# Allegro board MOTHER_BOARD-ROA.brd
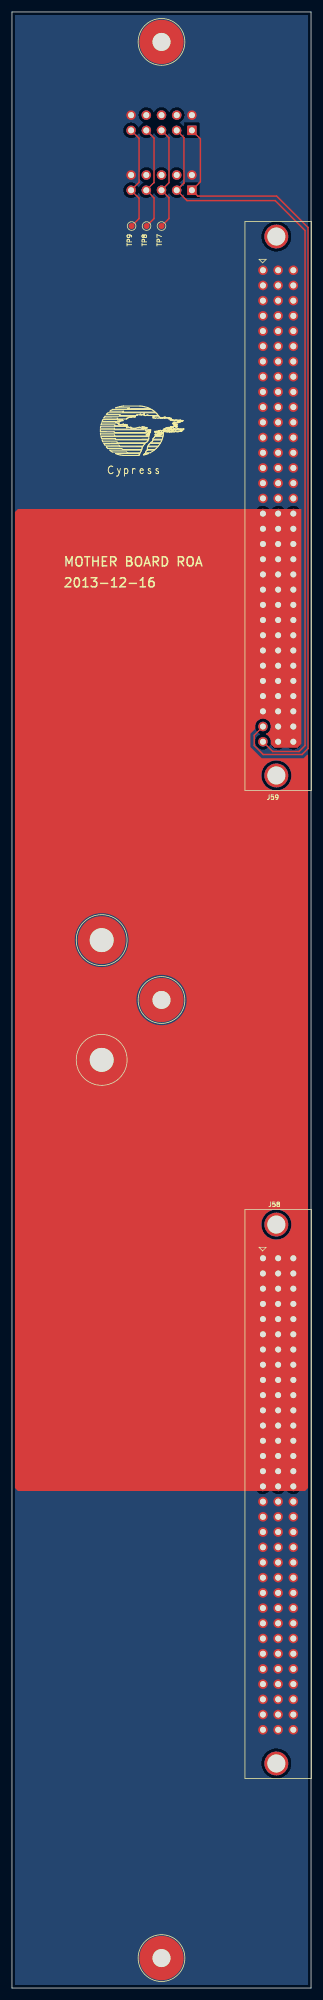
[diagram p0: board, top side]
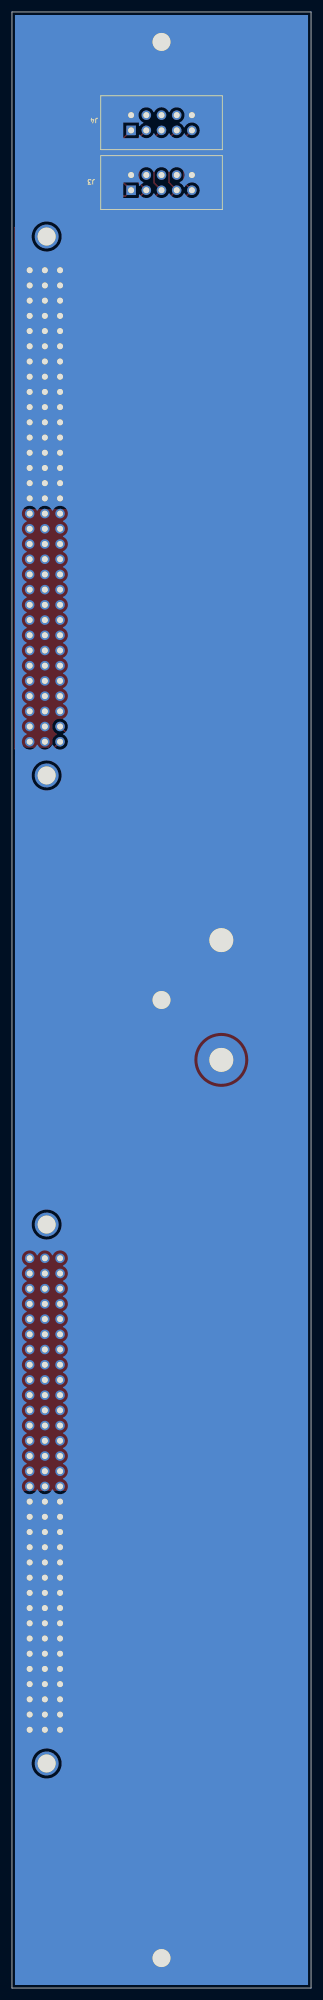
[diagram p1: board, bottom side, seen from below]

Outline 50 x 330 mm; copper layers: TOP, BOTTOM. Coordinates in mm from the lower left corner of the outline.
Outline path: 0,330 50,330 50,0 0,0 0,330

## Placement (name value [footprint] x y rotation side)
J3  HDR2X5  [2X5_2D54]  25 301.5 180 bottom
J4  HDR2X5  [2X5_2D54]  25 311.5 180 bottom
J58  DIN41612_9001-13961C00A  [9001-13961C00A]  44.5 82.5 270 top
J59  DIN41612_9001-13961C00A  [9001-13961C00A]  44.5 247.5 270 top
NOREF  -  []  19 262.5 0 top
POWER_PAD1  TESTPOINT  [4_8DIPPAD]  15 155 0 top
POWER_PAD2  TESTPOINT  [4_8DIPPAD]  15 175 0 top
SH1  SH  [MTH-11]  25 5 0 top
SH2  SH  [MTH-11]  25 165 0 top
SH3  SH  [MTH-11]  25 325 0 top
TP7  TESTPOINT  [TPOINT]  25 294.25 0 top
TP8  TESTPOINT  [TPOINT]  22.5 294.25 0 top
TP9  TESTPOINT  [TPOINT]  20 294.25 0 top

## Library data of the parts
J3 J4 = 2X5_2D54
J58 J59 = 9001-13961C00A
POWER_PAD1 POWER_PAD2 = 4_8DIPPAD
SH1-SH3 = MTH-11
TP7-TP9 = TPOINT

## Footprints (pads in the part's own frame, mm; a bottom-side part is the same pattern mirrored in y, then rotated)
2X5_2D54
  rect 1.6x1.6 hole 1: 1(-5.08,-1.27)
  round 1.6 hole 1: 2(-5.08,1.27) 3(-2.54,-1.27) 4(-2.54,1.27) 5(0,-1.27) 6(0,1.27) 7(2.54,-1.27) 8(2.54,1.27) 9(5.08,-1.27) 10(5.08,1.27)
4_8DIPPAD
  round 8 hole 4: 1(0,0)
9001-13961C00A
  round 1.6 hole 1: 1(-39.37,-2.54) 2(-36.83,-2.54) 3(-34.29,-2.54) 4(-31.75,-2.54) 5(-29.21,-2.54) 6(-26.67,-2.54) 7(-24.13,-2.54) 8(-21.59,-2.54) 9(-19.05,-2.54) 10(-16.51,-2.54) 11(-13.97,-2.54) 12(-11.43,-2.54) 13(-8.89,-2.54) 14(-6.35,-2.54) 15(-3.81,-2.54) 16(-1.27,-2.54) 17(1.27,-2.54) 18(3.81,-2.54) 19(6.35,-2.54) 20(8.89,-2.54) 21(11.43,-2.54) 22(13.97,-2.54) 23(16.51,-2.54) 24(19.05,-2.54) 25(21.59,-2.54) 26(24.13,-2.54) 27(26.67,-2.54) 28(29.21,-2.54) 29(31.75,-2.54) 30(34.29,-2.54) 31(36.83,-2.54) 32(39.37,-2.54) 33(-39.37,0) 34(-36.83,0) 35(-34.29,0) 36(-31.75,0) 37(-29.21,0) 38(-26.67,0) 39(-24.13,0) 40(-21.59,0) 41(-19.05,0) 42(-16.51,0) 43(-13.97,0) 44(-11.43,0) 45(-8.89,0) 46(-6.35,0) 47(-3.81,0) 48(-1.27,0) 49(1.27,0) 50(3.81,0) 51(6.35,0) 52(8.89,0) 53(11.43,0) 54(13.97,0) 55(16.51,0) 56(19.05,0) 57(21.59,0) 58(24.13,0) 59(26.67,0) 60(29.21,0) 61(31.75,0) 62(34.29,0) 63(36.83,0) 64(39.37,0) 65(-39.37,2.54) 66(-36.83,2.54) 67(-34.29,2.54) 68(-31.75,2.54) 69(-29.21,2.54) 70(-26.67,2.54) 71(-24.13,2.54) 72(-21.59,2.54) 73(-19.05,2.54) 74(-16.51,2.54) 75(-13.97,2.54) 76(-11.43,2.54) 77(-8.89,2.54) 78(-6.35,2.54) 79(-3.81,2.54) 80(-1.27,2.54) 81(1.27,2.54) 82(3.81,2.54) 83(6.35,2.54) 84(8.89,2.54) 85(11.43,2.54) 86(13.97,2.54) 87(16.51,2.54) 88(19.05,2.54) 89(21.59,2.54) 90(24.13,2.54) 91(26.67,2.54) 92(29.21,2.54) 93(31.75,2.54) 94(34.29,2.54) 95(36.83,2.54) 96(39.37,2.54)
  round 4 hole 3: 97(-45,-0.3) 98(45,-0.3)
MTH-11
  round 7.4 hole 3: 1(0,0)
TPOINT
  round 1 smd: 1(0,0)

## Nets
GND: J3.2 J3.10 J4.2 J4.10 J58.17 J58.18 J58.19 J58.20 J58.21 J58.22 J58.23 J58.24 J58.25 J58.26 J58.27 J58.28 J58.29 J58.30 J58.31 J58.32 J58.49 J58.50 J58.51 J58.52 J58.53 J58.54 J58.55 J58.56 J58.57 J58.58 J58.59 J58.60 J58.61 J58.62 J58.63 J58.64 J58.81 J58.82 J58.83 J58.84 J58.85 J58.86 J58.87 J58.88 J58.89 J58.90 J58.91 J58.92 J58.93 J58.94 J58.95 J58.96 J59.1 J59.2 J59.3 J59.4 J59.5 J59.6 J59.7 J59.8 J59.9 J59.10 J59.11 J59.12 J59.13 J59.14 J59.15 J59.16 J59.33 J59.34 J59.35 J59.36 J59.37 J59.38 J59.39 J59.40 J59.41 J59.42 J59.43 J59.44 J59.45 J59.46 J59.47 J59.48 J59.65 J59.66 J59.67 J59.68 J59.69 J59.70 J59.71 J59.72 J59.73 J59.74 J59.75 J59.76 J59.77 J59.78 J59.79 J59.80 POWER_PAD2.1 SH1.1 SH2.1 SH3.1
AARDVARK SCL: J3.1 J4.1 J59.31
AARDVARK SDA: J3.3 J4.3 J59.32
ATX_IN: J58.1 J58.2 J58.3 J58.4 J58.5 J58.6 J58.7 J58.8 J58.9 J58.10 J58.11 J58.12 J58.13 J58.14 J58.15 J58.16 J58.33 J58.34 J58.35 J58.36 J58.37 J58.38 J58.39 J58.40 J58.41 J58.42 J58.43 J58.44 J58.45 J58.46 J58.47 J58.48 J58.65 J58.66 J58.67 J58.68 J58.69 J58.70 J58.71 J58.72 J58.73 J58.74 J58.75 J58.76 J58.77 J58.78 J58.79 J58.80 J59.17 J59.18 J59.19 J59.20 J59.21 J59.22 J59.23 J59.24 J59.25 J59.26 J59.27 J59.28 J59.29 J59.30 J59.49 J59.50 J59.51 J59.52 J59.53 J59.54 J59.55 J59.56 J59.57 J59.58 J59.59 J59.60 J59.61 J59.62 J59.63 J59.64 J59.81 J59.82 J59.83 J59.84 J59.85 J59.86 J59.87 J59.88 J59.89 J59.90 J59.91 J59.92 J59.93 J59.94 J59.95 J59.96 POWER_PAD1.1
PIOA: J3.7 J4.7 TP8.1
PIOB: J3.9 J4.9 TP9.1
PIOC: J3.5 J4.5 TP7.1

Pads without a net: J3 4 6 8; J4 4 6 8; J58 97 98; J59 97 98

## Routing (per net, layer and track width the routed paths; a pad name or vN(x,y) marks a point on that pad's centre or on a via; arc(x,y) is an arc through that point)
AARDVARK SCL: length 134
  TOP w0.25: J4.1 31.5,308.81 31.5,301.65 J3.1 31.06,299.25 44.25,299.25 49.5,294 49.5,207 48.5,206 42,206 40.5,207.5 40.5,209.21 J59.31
AARDVARK SDA: length 129.4
  TOP w0.25: J59.32 43.59,206.5 48,206.5 49,207.5 49,293.5 44,298.5 29.27,298.5 J3.3 28.75,301.44 28.75,309.02 J4.3
PIOA: length 18.1
  TOP w0.25: TP8.1 23.75,295.5 23.75,298.94 J3.7 23.75,301.52 23.75,308.94 J4.7
PIOB: length 18.2
  TOP w0.25: TP9.1 21.25,295.5 21.25,298.9 J3.9 21.25,301.56 21.25,308.9 J4.9
PIOC: length 18.1
  TOP w0.25: J4.5 26.25,308.98 26.25,301.48 J3.5 26.25,298.98 26.25,295.5 TP7.1

## Copper pours and planes (outline as drawn; the poured copper is in the pictures)
GND on BOTTOM (solid shape): outline of 4074 points within 0.5,0.5 49.5,329.5
ATX_IN on TOP (solid shape): 48.32,247 48.35,246.99 48.37,246.98 48.37,246.95 48.37,207.76 47.74,207.13 43.85,207.13 43.23,207.75 43.22,207.77 43.23,207.84 43.25,207.94 43.26,208.04 43.26,208.14 43.26,208.24 43.24,208.34 43.22,208.44 43.19,208.54 43.16,208.63 43.12,208.72 43.07,208.81 43.01,208.9 42.95,208.98 42.88,209.05 42.81,209.12 42.73,209.18 42.64,209.24 42.56,209.29 42.5,209.31 42.48,209.33 42.46,209.36 42.45,209.39 42.45,209.41 42.46,209.44 42.48,209.47 42.5,209.49 42.56,209.51 42.64,209.56 42.73,209.62 42.81,209.68 42.88,209.75 42.95,209.83 43.01,209.91 43.07,209.99 43.12,210.08 43.16,210.17 43.2,210.27 43.23,210.37 43.24,210.47 43.26,210.57 43.26,210.67 43.26,210.77 43.24,210.87 43.23,210.97 43.2,211.07 43.16,211.17 43.12,211.26 43.07,211.35 43.01,211.43 42.95,211.51 42.88,211.59 42.81,211.66 42.73,211.72 42.64,211.78 42.56,211.83 42.46,211.87 42.37,211.91 42.27,211.93 42.17,211.95 42.07,211.97 41.97,211.97 41.87,211.97 41.77,211.96 41.67,211.94 41.57,211.91 41.47,211.88 41.38,211.83 41.29,211.78 41.2,211.73 41.12,211.67 41.05,211.6 40.98,211.52 40.92,211.44 40.86,211.36 40.81,211.27 40.76,211.18 40.73,211.09 40.7,210.99 40.68,210.89 40.66,210.79 40.66,210.69 40.66,210.58 40.67,210.48 40.69,210.38 40.71,210.32 40.7,210.29 39.87,209.47 39.87,207.24 41.74,205.37 48.76,205.37 49.33,205.94 49.34,205.95 49.36,205.97 49.39,205.97 49.42,205.97 49.45,205.96 49.47,205.94 49.49,205.91 49.5,205.89 49.5,205.87 49.5,83.5 49,83 1,83 0.5,83.5 0.5,127.5 41.7,127.5 41.7,127.36 41.72,127.22 41.74,127.08 41.76,126.94 41.8,126.8 41.84,126.67 41.89,126.53 41.95,126.41 42.02,126.28 42.09,126.16 42.17,126.04 42.25,125.93 42.35,125.82 42.44,125.72 42.55,125.62 42.66,125.53 42.77,125.45 42.89,125.37 43.01,125.3 43.14,125.24 43.27,125.18 43.4,125.13 43.54,125.09 43.67,125.06 43.81,125.03 43.95,125.01 44.09,125 44.24,125 44.38,125.01 44.52,125.02 44.66,125.04 44.8,125.07 44.93,125.11 45.07,125.15 45.2,125.21 45.33,125.27 45.45,125.33 45.57,125.41 45.69,125.49 45.8,125.58 45.9,125.67 46.01,125.77 46.1,125.87 46.19,125.98 46.27,126.1 46.35,126.22 46.42,126.34 46.48,126.47 46.53,126.6 46.58,126.73 46.62,126.87 46.65,127.01 46.68,127.15 46.69,127.29 46.7,127.43 46.7,127.57 46.69,127.71 46.68,127.85 46.65,127.99 46.62,128.13 46.58,128.27 46.53,128.4 46.48,128.53 46.42,128.66 46.35,128.78 46.27,128.9 46.19,129.02 46.1,129.13 46.01,129.23 45.9,129.33 45.8,129.42 45.69,129.51 45.57,129.59 45.45,129.67 45.33,129.73 45.2,129.79 45.07,129.85 44.93,129.89 44.8,129.93 44.66,129.96 44.52,129.98 44.38,129.99 44.24,130 44.09,130 43.95,129.99 43.81,129.97 43.67,129.94 43.54,129.91 43.4,129.87 43.27,129.82 43.14,129.76 43.01,129.7 42.89,129.63 42.77,129.55 42.66,129.47 42.55,129.38 42.44,129.28 42.35,129.18 42.25,129.07 42.17,128.96 42.09,128.84 42.02,128.72 41.95,128.59 41.89,128.47 41.84,128.33 41.8,128.2 41.76,128.06 41.74,127.92 41.72,127.78 41.7,127.64 41.7,127.5 0.5,127.5 0.5,165.09 20.8,165.09 20.8,164.91 20.81,164.73 20.82,164.54 20.85,164.36 20.88,164.18 20.92,164 20.97,163.82 21.02,163.65 21.08,163.48 21.16,163.31 21.23,163.14 21.32,162.98 21.41,162.82 21.51,162.67 21.61,162.52 21.72,162.37 21.84,162.23 21.97,162.1 22.1,161.97 22.23,161.84 22.37,161.72 22.52,161.61 22.67,161.51 22.82,161.41 22.98,161.32 23.14,161.23 23.31,161.16 23.48,161.08 23.65,161.02 23.82,160.97 24,160.92 24.18,160.88 24.36,160.85 24.54,160.82 24.73,160.81 24.91,160.8 25.09,160.8 25.27,160.81 25.46,160.82 25.64,160.85 25.82,160.88 26,160.92 26.18,160.97 26.35,161.02 26.52,161.08 26.69,161.16 26.86,161.23 27.02,161.32 27.18,161.41 27.33,161.51 27.48,161.61 27.63,161.72 27.77,161.84 27.9,161.97 28.03,162.1 28.16,162.23 28.28,162.37 28.39,162.52 28.49,162.67 28.59,162.82 28.68,162.98 28.77,163.14 28.84,163.31 28.92,163.48 28.98,163.65 29.03,163.82 29.08,164 29.12,164.18 29.15,164.36 29.18,164.54 29.19,164.73 29.2,164.91 29.2,165.09 29.19,165.27 29.18,165.46 29.15,165.64 29.12,165.82 29.08,166 29.03,166.18 28.98,166.35 28.92,166.52 28.84,166.69 28.77,166.86 28.68,167.02 28.59,167.18 28.49,167.33 28.39,167.48 28.28,167.63 28.16,167.77 28.03,167.9 27.9,168.03 27.77,168.16 27.63,168.28 27.48,168.39 27.33,168.49 27.18,168.59 27.02,168.68 26.86,168.77 26.69,168.84 26.52,168.92 26.35,168.98 26.18,169.03 26,169.08 25.82,169.12 25.64,169.15 25.46,169.18 25.27,169.19 25.09,169.2 24.91,169.2 24.73,169.19 24.54,169.18 24.36,169.15 24.18,169.12 24,169.08 23.82,169.03 23.65,168.98 23.48,168.92 23.31,168.84 23.14,168.77 22.98,168.68 22.82,168.59 22.67,168.49 22.52,168.39 22.37,168.28 22.23,168.16 22.1,168.03 21.97,167.9 21.84,167.77 21.72,167.63 21.61,167.48 21.51,167.33 21.41,167.18 21.32,167.02 21.23,166.86 21.16,166.69 21.08,166.52 21.02,166.35 20.97,166.18 20.92,166 20.88,165.82 20.85,165.64 20.82,165.46 20.81,165.27 20.8,165.09 0.5,165.09 0.5,175 10.5,175 10.5,174.81 10.52,174.62 10.54,174.43 10.56,174.24 10.6,174.06 10.64,173.87 10.69,173.69 10.75,173.51 10.82,173.33 10.89,173.16 10.97,172.99 11.06,172.82 11.16,172.65 11.26,172.49 11.37,172.34 11.49,172.19 11.61,172.04 11.73,171.9 11.87,171.77 12.01,171.64 12.15,171.52 12.3,171.4 12.46,171.29 12.61,171.18 12.78,171.09 12.94,171 13.11,170.91 13.29,170.84 13.47,170.77 13.65,170.71 13.83,170.65 14.01,170.61 14.2,170.57 14.39,170.54 14.57,170.52 14.76,170.51 14.95,170.5 15.14,170.5 15.33,170.51 15.52,170.53 15.71,170.56 15.9,170.59 16.08,170.63 16.26,170.68 16.44,170.74 16.62,170.8 16.8,170.87 16.97,170.95 17.14,171.04 17.3,171.13 17.47,171.23 17.62,171.34 17.77,171.46 17.92,171.58 18.06,171.7 18.2,171.83 18.33,171.97 18.45,172.12 18.57,172.26 18.69,172.42 18.79,172.57 18.89,172.74 18.98,172.9 19.07,173.07 19.14,173.24 19.21,173.42 19.28,173.6 19.33,173.78 19.38,173.97 19.42,174.15 19.45,174.34 19.48,174.53 19.49,174.72 19.5,174.91 19.5,175.09 19.49,175.28 19.48,175.47 19.45,175.66 19.42,175.85 19.38,176.03 19.33,176.22 19.28,176.4 19.21,176.58 19.14,176.76 19.07,176.93 18.98,177.1 18.89,177.26 18.79,177.43 18.69,177.58 18.57,177.74 18.45,177.88 18.33,178.03 18.2,178.17 18.06,178.3 17.92,178.42 17.77,178.54 17.62,178.66 17.47,178.77 17.3,178.87 17.14,178.96 16.97,179.05 16.8,179.13 16.62,179.2 16.44,179.26 16.26,179.32 16.08,179.37 15.9,179.41 15.71,179.44 15.52,179.47 15.33,179.49 15.14,179.5 14.95,179.5 14.76,179.49 14.57,179.48 14.39,179.46 14.2,179.43 14.01,179.39 13.83,179.35 13.65,179.29 13.47,179.23 13.29,179.16 13.11,179.09 12.94,179 12.78,178.91 12.61,178.82 12.46,178.71 12.3,178.6 12.15,178.48 12.01,178.36 11.87,178.23 11.73,178.1 11.61,177.96 11.49,177.81 11.37,177.66 11.26,177.51 11.16,177.35 11.06,177.18 10.97,177.01 10.89,176.84 10.82,176.67 10.75,176.49 10.69,176.31 10.64,176.13 10.6,175.94 10.56,175.76 10.54,175.57 10.52,175.38 10.5,175.19 10.5,175 0.5,175 0.5,202.5 41.7,202.5 41.7,202.36 41.72,202.22 41.74,202.08 41.76,201.94 41.8,201.8 41.84,201.67 41.89,201.53 41.95,201.41 42.02,201.28 42.09,201.16 42.17,201.04 42.25,200.93 42.35,200.82 42.44,200.72 42.55,200.62 42.66,200.53 42.77,200.45 42.89,200.37 43.01,200.3 43.14,200.24 43.27,200.18 43.4,200.13 43.54,200.09 43.67,200.06 43.81,200.03 43.95,200.01 44.09,200 44.24,200 44.38,200.01 44.52,200.02 44.66,200.04 44.8,200.07 44.93,200.11 45.07,200.15 45.2,200.21 45.33,200.27 45.45,200.33 45.57,200.41 45.69,200.49 45.8,200.58 45.9,200.67 46.01,200.77 46.1,200.87 46.19,200.98 46.27,201.1 46.35,201.22 46.42,201.34 46.48,201.47 46.53,201.6 46.58,201.73 46.62,201.87 46.65,202.01 46.68,202.15 46.69,202.29 46.7,202.43 46.7,202.57 46.69,202.71 46.68,202.85 46.65,202.99 46.62,203.13 46.58,203.27 46.53,203.4 46.48,203.53 46.42,203.66 46.35,203.78 46.27,203.9 46.19,204.02 46.1,204.13 46.01,204.23 45.9,204.33 45.8,204.42 45.69,204.51 45.57,204.59 45.45,204.67 45.33,204.73 45.2,204.79 45.07,204.85 44.93,204.89 44.8,204.93 44.66,204.96 44.52,204.98 44.38,204.99 44.24,205 44.09,205 43.95,204.99 43.81,204.97 43.67,204.94 43.54,204.91 43.4,204.87 43.27,204.82 43.14,204.76 43.01,204.7 42.89,204.63 42.77,204.55 42.66,204.47 42.55,204.38 42.44,204.28 42.35,204.18 42.25,204.07 42.17,203.96 42.09,203.84 42.02,203.72 41.95,203.59 41.89,203.47 41.84,203.33 41.8,203.2 41.76,203.06 41.74,202.92 41.72,202.78 41.7,202.64 41.7,202.5 0.5,202.5 0.5,246.5 1,247

## Text on the board
Ref Des/Silkscreen Top: MOTHER BOARD ROA | 2013-12-16
NCLEGEND-1-2: FIGURE | SIZE | 1.0 | 3.0 | 4.0 | DRILL CHART: TOP to BOTTOM | ALL UNITS ARE IN MILLIMETERS | PLATED | QTY | 212 | 7 | 2
